# EAGLE board geiger OLD (EAGLE 8.4.1)
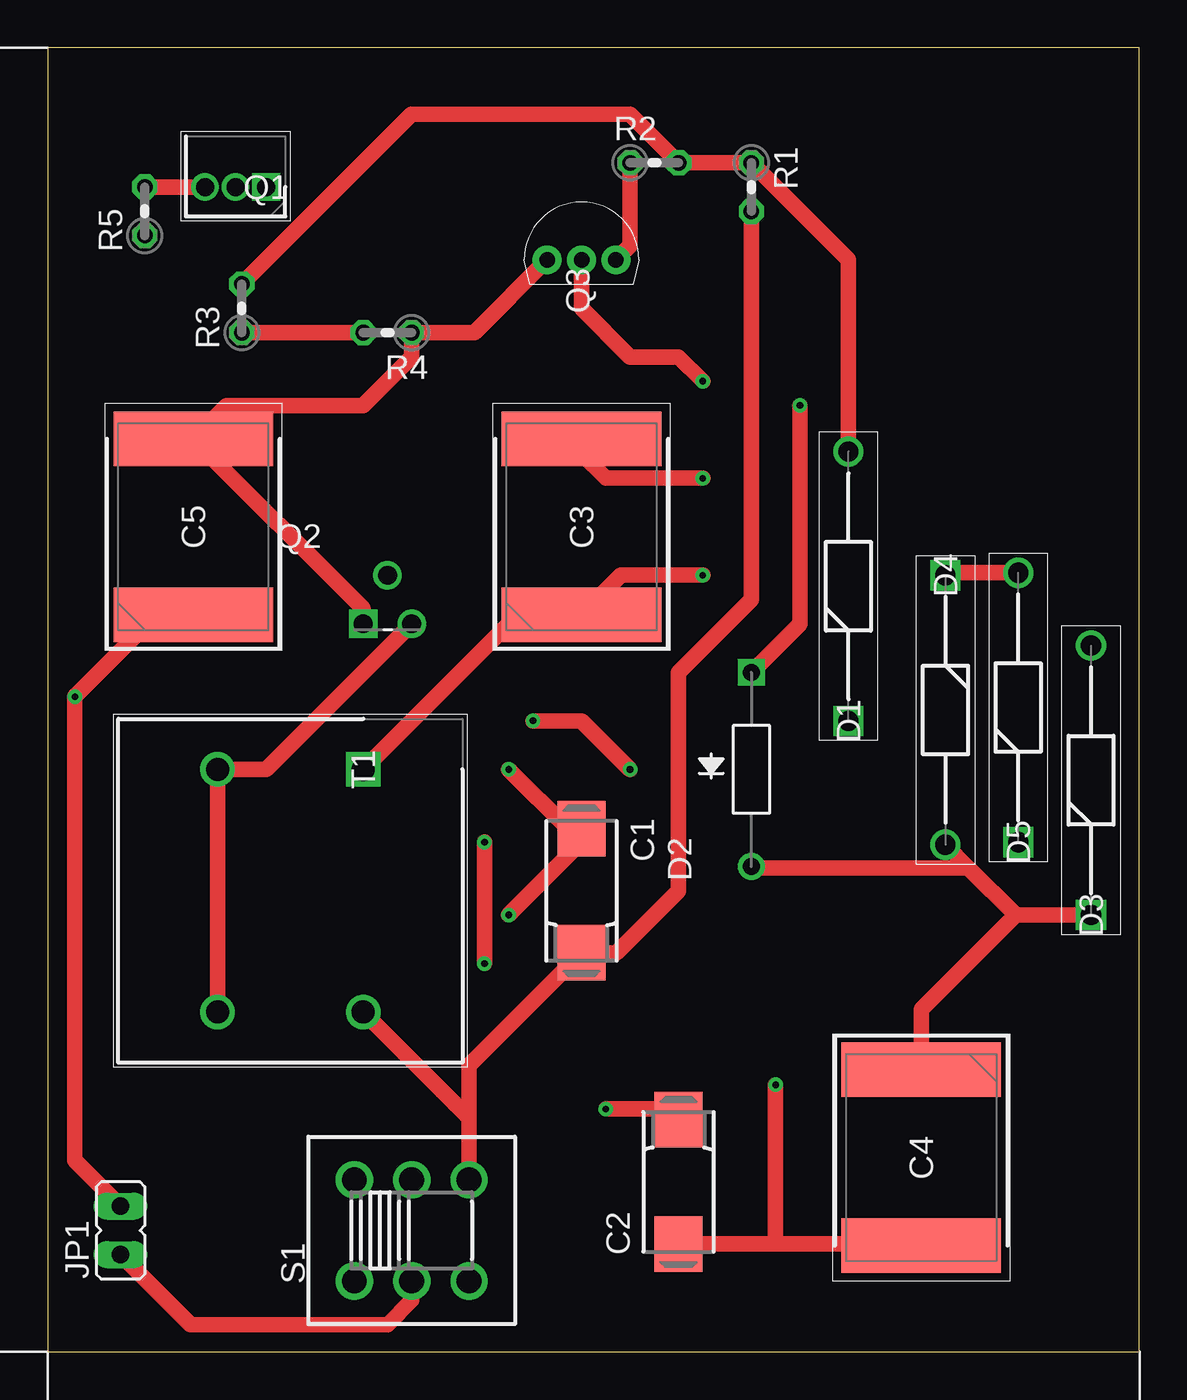
[diagram p0: board, top side]
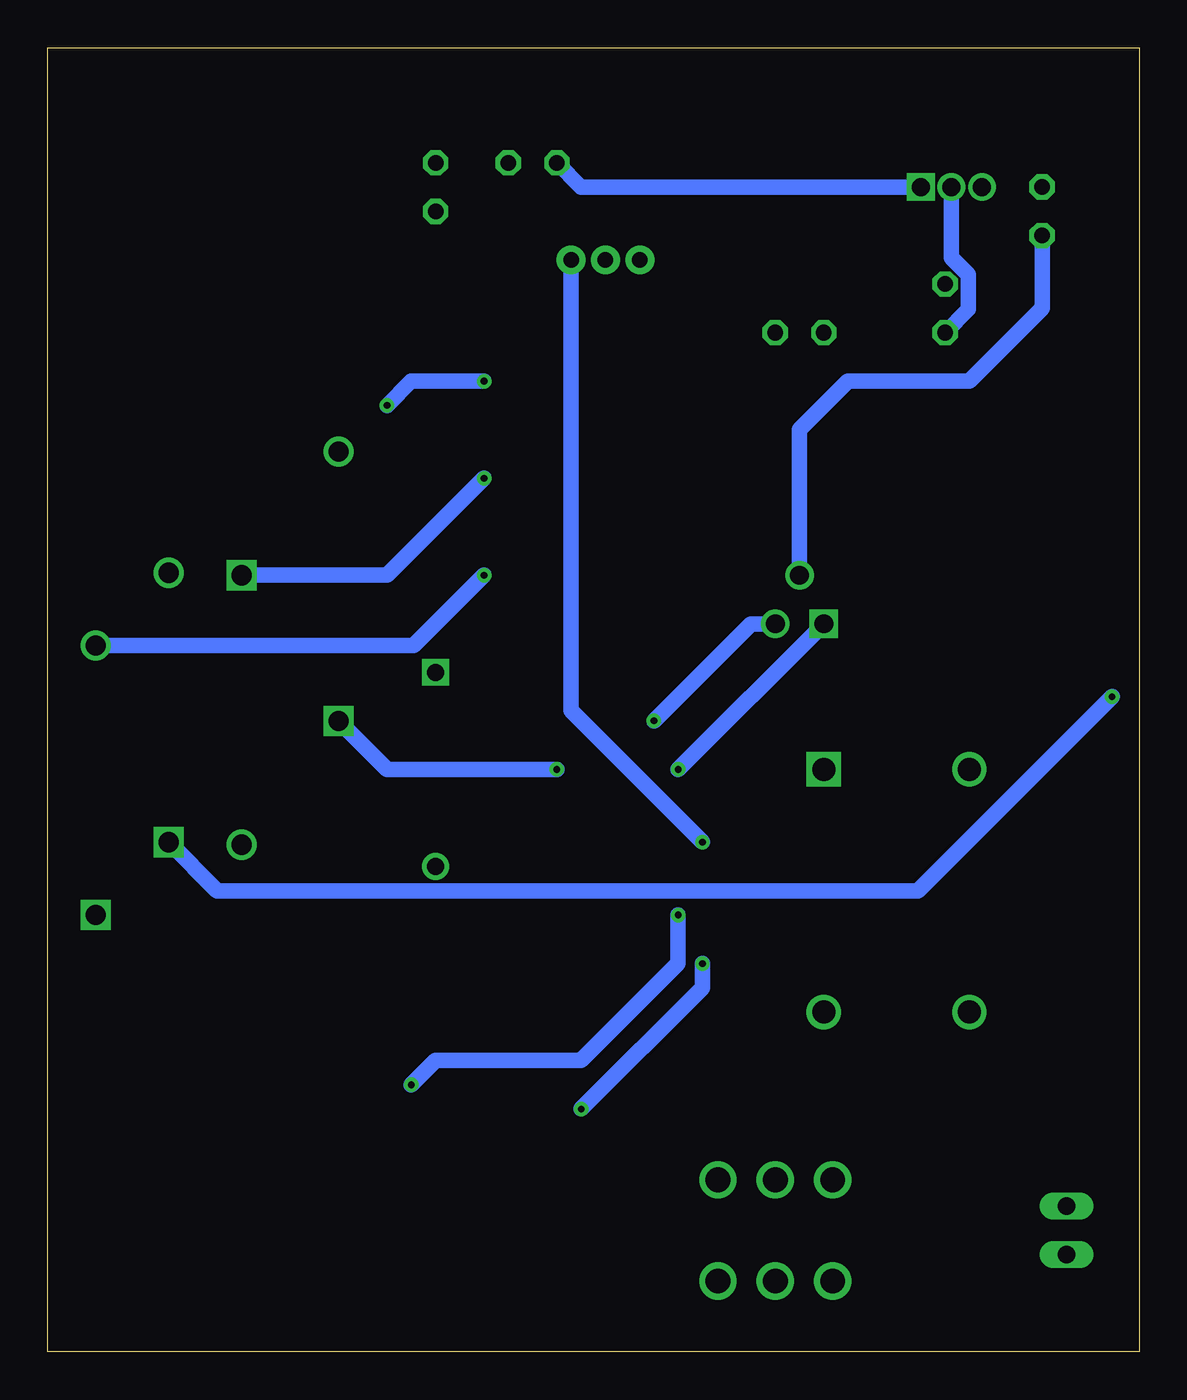
[diagram p1: board, bottom side, seen from below]

Size 57.13 x 68.25 mm. Coordinates in mm from the lower left corner, seen from the top.
Outline: 0,0 57.13,0 57.13,68.25 0,68.25 0,0
Copper layers (1*16): Top 0.035mm / dielectric 1.5mm / Bottom 0.035mm
Design rules "default": minimum track width 6mil, minimum drill 0.35mm, track to track 6mil, track to pad 6mil, pad to pad 6mil, via to via 6mil, smd to smd 6mil, copper to edge 40mil, drill to drill 6mil, minimum pad ring 10mil, minimum via ring 8mil, stop-mask expansion 4mil, vias tented up to drill 0mil, thermal gap 10mil

## Footprints (pad centres in the part's own frame; a part is rotated, then mirrored left to right if it is on the bottom)
085CS_1AR = smd 2.9 x 2.5: + 3.25,0; - -3.25,0
CAPPC10878X450N = smd 2.85 x 8.35: 1 -4.6,0; 2 4.6,0
DIOAD1405W86L465D235 = drill 1.05 pad 1.575 square: 1 0,0 | drill 1.05 pad 1.575: 2 14.1,0
DIO_1N914 = drill 0.889 pad 1.333: 1 -10.16,0 | drill 0.889 pad 1.333 square: 2 0,0
JP1 = drill 0.914 long: 1 0,-1.27; 2 0,1.27
TO160P419X482X533-3P = drill 0.94 pad 1.41 square: 1 0,0 | drill 0.94 pad 1.41: 2 1.6,0; 3 3.2,0
TO127P254X635-3 = drill 0.991 pad 1.486 square: 1 -2.54,-2.54 | drill 0.991 pad 1.486: 2 -1.27,0; 3 0,-2.54
TO-92 = drill 0.81 pad 1.51: 1 0,-1.8; 2 0,0; 3 0,1.8
0204V = drill 0.813 octagon: 1 -1.27,0; 2 1.27,0
2P2T = drill 1.3 pad 1.93: 1.1 -3,2.65; 1.2 -3,-2.65; 2.1 0,2.65; 2.2 0,-2.65; 3.1 3,2.65; 3.2 3,-2.65
HDRV4W100P762X1270_2X2_1800X18 = drill 1.2 pad 1.8 square: 1 0,0 | drill 1.2 pad 1.8: 2 0,-7.62; 3 12.7,0; 4 12.7,-7.62

## Placement (x,y rotation side)
C1  100μF  [085CS_1AR]  27.94,24.13 270 top
C2  100μF  [085CS_1AR]  33.02,8.89 90 top
C3  B58031I7504M062  [CAPPC10878X450N]  27.94,43.18 90 top
C4  B58031I7504M062  [CAPPC10878X450N]  45.72,10.16 270 top
C5  B58031I7504M062  [CAPPC10878X450N]  7.62,43.18 90 top
D1  1N4007GP-E3_54  [DIOAD1405W86L465D235]  41.91,33.02 90 top
D2  1N914  [DIO_1N914]  36.83,35.56 90 top
D3  1N4007GP-E3_54  [DIOAD1405W86L465D235]  54.61,22.86 90 top
D4  1N4007GP-E3_54  [DIOAD1405W86L465D235]  46.99,40.64 270 top
D5  1N4007GP-E3_54  [DIOAD1405W86L465D235]  50.8,26.67 90 top
JP1  [JP1]  3.81,6.35 0 top
Q1  2N4403  [TO160P419X482X533-3P]  11.43,60.96 180 top
Q2  MPSA42  [TO127P254X635-3]  19.05,40.64 0 top
Q3  2N4401RLRAG  [TO-92]  27.94,57.15 270 top
R1  1K  [0204V]  36.83,60.96 270 top
R2  1K  [0204V]  31.75,62.23 0 top
R3  100K  [0204V]  10.16,54.61 90 top
R4  150K  [0204V]  17.78,53.34 180 top
R5  1.8K  [0204V]  5.08,59.69 90 top
S1  2P2T  [2P2T]  19.05,6.35 0 top
T1  P1200  [HDRV4W100P762X1270_2X2_1800X18]  16.51,30.48 270 top

## Library data of the parts
C1 C2 R1-R5 = resistor
C3-C5 = SamacSys_Parts; DESCRIPTION: EPCOS - B58031I7504M062 - CAP, MLCC, AEC-Q200, 0.5UF, 700V, SMD; HEIGHT: 4.5mm; MANUFACTURER_NAME: EPCOS; MANUFACTURER_PART_NUMBER: B58031I7504M062; SUPPLIER_NAME: RS
D1 D3-D5 = SamacSys_Parts; DESCRIPTION: Vishay 1N4007GP-E3/54, Switching Diode, 1000V 1A, 2000ns, 2-Pin DO-204AL; HEIGHT: mm; MANUFACTURER_NAME: Vishay; MANUFACTURER_PART_NUMBER: 1N4007GP-E3/54; RS_PART_NUMBER: 7087984P; SUPPLIER_NAME: RS
D2 = SamacSys_Parts; DESCRIPTION: Small Signal Diode; HEIGHT: mm; MANUFACTURER_NAME: Fairchild Semiconductor; MANUFACTURER_PART_NUMBER: 1N914; SUPPLIER_NAME: RS
JP1 = jumper
Q1 = SamacSys_Parts; DESCRIPTION: MULTICOMP - 2N4403 - TRANSISTOR, PNP, -40V, -0.6A, TO-92; HEIGHT: 4.19mm; MANUFACTURER_NAME: MULTICOMP; MANUFACTURER_PART_NUMBER: 2N4403; SUPPLIER_NAME: RS
Q2 = SamacSys_Parts; DESCRIPTION: Transistor; HEIGHT: mm; MANUFACTURER_NAME: Fairchild Semiconductor; MANUFACTURER_PART_NUMBER: MPSA42; RS_PART_NUMBER: 1241357; SUPPLIER_NAME: RS
Q3 = SamacSys_Parts; ALLIED_NUMBER: 70100181; DESCRIPTION: Transistor NPN 40V 600mA TO92 ON Semi 2N4401RLRAG NPN Bipolar Transistor, 600 mA 40 V, 3-Pin TO-92; HEIGHT: mm; MANUFACTURER_NAME: ON Semiconductor; MANUFACTURER_PART_NUMBER: 2N4401RLRAG; RS_PART_NUMBER: 7925476; SUPPLIER_NAME: RS
S1 = switch
T1 = SamacSys_Parts; DESCRIPTION: ETAL - P1200 - TRANSFORMER, LINE MATCHING, V.32 BIS; HEIGHT: 12.6mm; MANUFACTURER_NAME: ETAL; MANUFACTURER_PART_NUMBER: P1200; SUPPLIER_NAME: RS

## Nets
GND: C1.- C2.- C4.2 C5.2 Q2.1 Q3.1 R4.1
N$1: C1.+ R1.2 S1.3.1 T1.3
N$2: D1.2 R1.1 R2.2 R3.2
N$3: Q1.2 R3.1 R4.2
N$4: C2.+ Q1.1 Q3.3 R2.1
N$5: Q1.3 R5.2
N$6: D1.1 Q2.3 T1.2 T1.4
N$7: C3.1 D3.2 T1.1
N$8: Q2.2 R5.1
N$9: D2.2 Q3.2
N$10: C4.1 D2.1 D3.1 D4.2
N$11: C3.2 D4.1 D5.2
N$12: C5.1 D5.1 JP1.2
VCC: JP1.1 S1.2.2

## Tracks (layer width: path | path; a pad name or v marks a point on that pad's centre or on a via)
GND  (via drill 0.35)
  Top 0.813: v24.13,30.48 27.23,27.38 C1.- 27.94,26.67 v24.13,22.86 | Q2.1 16.51,38.89 C5.2 9.37,49.53 16.51,49.53 19.05,52.07 R4.1 22.33,53.34 Q3.1 | 38.1,5.64 C2.- | 38.1,5.64 45.64,5.64 C4.2 | v38.1,13.97 38.1,5.64
  Bottom 0.813: Q2.1 v24.13,30.48 | v24.13,22.86 24.13,20.32 29.21,15.24 36.83,15.24 v38.1,13.97
N$1
  Top 0.813: 22.05,12.24 T1.3 | 22.05,12.24 S1.3.1 | 22.05,12.24 22.05,14.99 C1.+ 29.77,20.88 33.02,24.13 33.02,35.56 36.83,39.37 R1.2
N$2
  Top 0.813: R3.2 19.05,64.77 30.48,64.77 R2.2 R1.1 41.91,57.15 D1.2
N$3
  Top 0.813: R3.1 R4.2
  Bottom 0.813: Q1.2 9.83,57.27 8.94,56.38 8.94,54.56 R3.1
N$4  (via drill 0.35)
  Top 0.813: R2.1 30.48,57.89 Q3.3 | v22.86,26.67 v22.86,20.32 | v29.21,12.7 32.46,12.7 C2.+
  Bottom 0.813: Q1.1 29.21,60.96 R2.1 | Q3.3 29.74,33.55 v22.86,26.67 | v22.86,20.32 22.86,19.05 v29.21,12.7
N$5
  Top 0.813: R5.2 Q1.3
N$6  (via drill 0.35)
  Top 0.813: T1.4 T1.2 11.43,30.48 Q2.3 | v25.4,33.02 27.94,33.02 v30.48,30.48
  Bottom 0.813: Q2.3 20.32,38.1 v25.4,33.02 | v30.48,30.48 39.37,30.48 D1.1
N$7  (via drill 0.35)
  Top 0.813: T1.1 24.61,38.58 C3.1 30,40.64 v34.29,40.64
  Bottom 0.813: D3.2 37.97,36.96 v34.29,40.64
N$8
  Bottom 0.813: R5.1 5.08,54.61 8.89,50.8 15.24,50.8 17.78,48.26 Q2.2
N$9  (via drill 0.35)
  Top 0.813: Q3.2 27.94,54.61 30.48,52.07 33.02,52.07 v34.29,50.8 | v39.37,49.53 39.37,38.1 D2.2
  Bottom 0.813: v34.29,50.8 38.1,50.8 v39.37,49.53
N$10
  Top 0.813: 48.2,25.34 D4.2 | 48.2,25.34 50.67,22.86 | 50.67,22.86 D3.1 | 50.67,22.86 45.72,17.91 C4.1 | D2.1 36.9,25.34 48.2,25.34
N$11  (via drill 0.35)
  Top 0.813: D5.2 47.12,40.77 D4.1 | v34.29,45.72 29.21,45.72 27.94,46.99 C3.2
  Bottom 0.813: D4.1 39.37,40.64 v34.29,45.72
N$12  (via drill 0.35)
  Top 0.813: JP1.2 1.42,10.01 v1.42,34.29 5.71,38.58 C5.1
  Bottom 0.813: v1.42,34.29 11.58,24.13 48.26,24.13 D5.1
VCC
  Top 0.813: JP1.1 7.47,1.42 17.78,1.42 19.05,2.69 S1.2.2